# Altium PCB PCB2.PcbDoc
Units mm, origin at the board's own origin, x right, y up, seen from the top; angles counter-clockwise.
Board outline 100.24 x 100.25 mm, 2 copper layers (Top Layer, Bottom Layer); 22 components, 12 nets, 50 pads, 20 vias.
Unrouted connection lines stored in the file: 3.
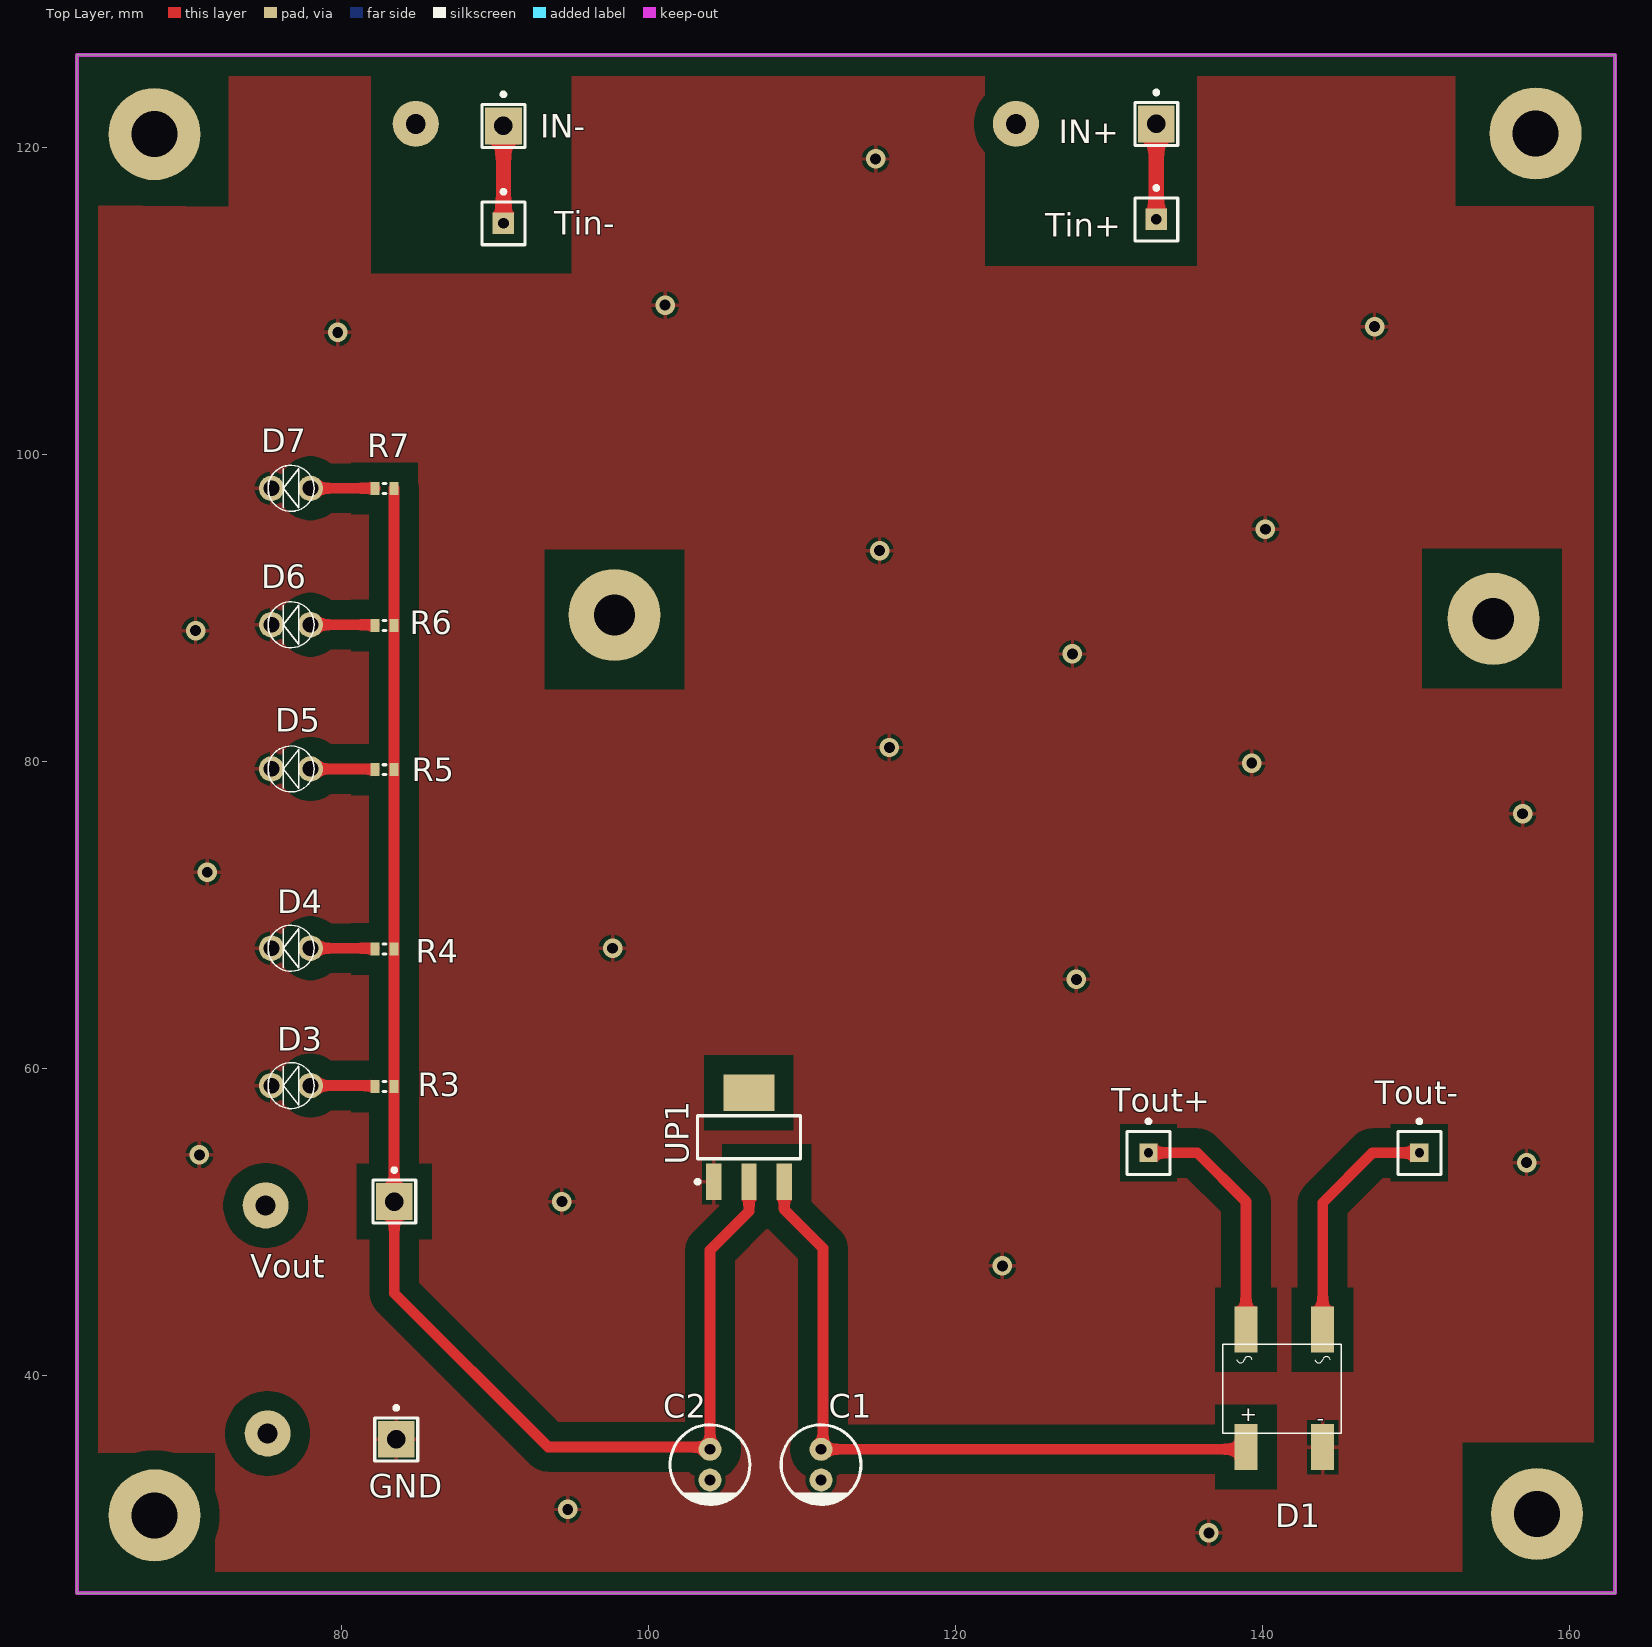
[diagram p0: Top Layer view]
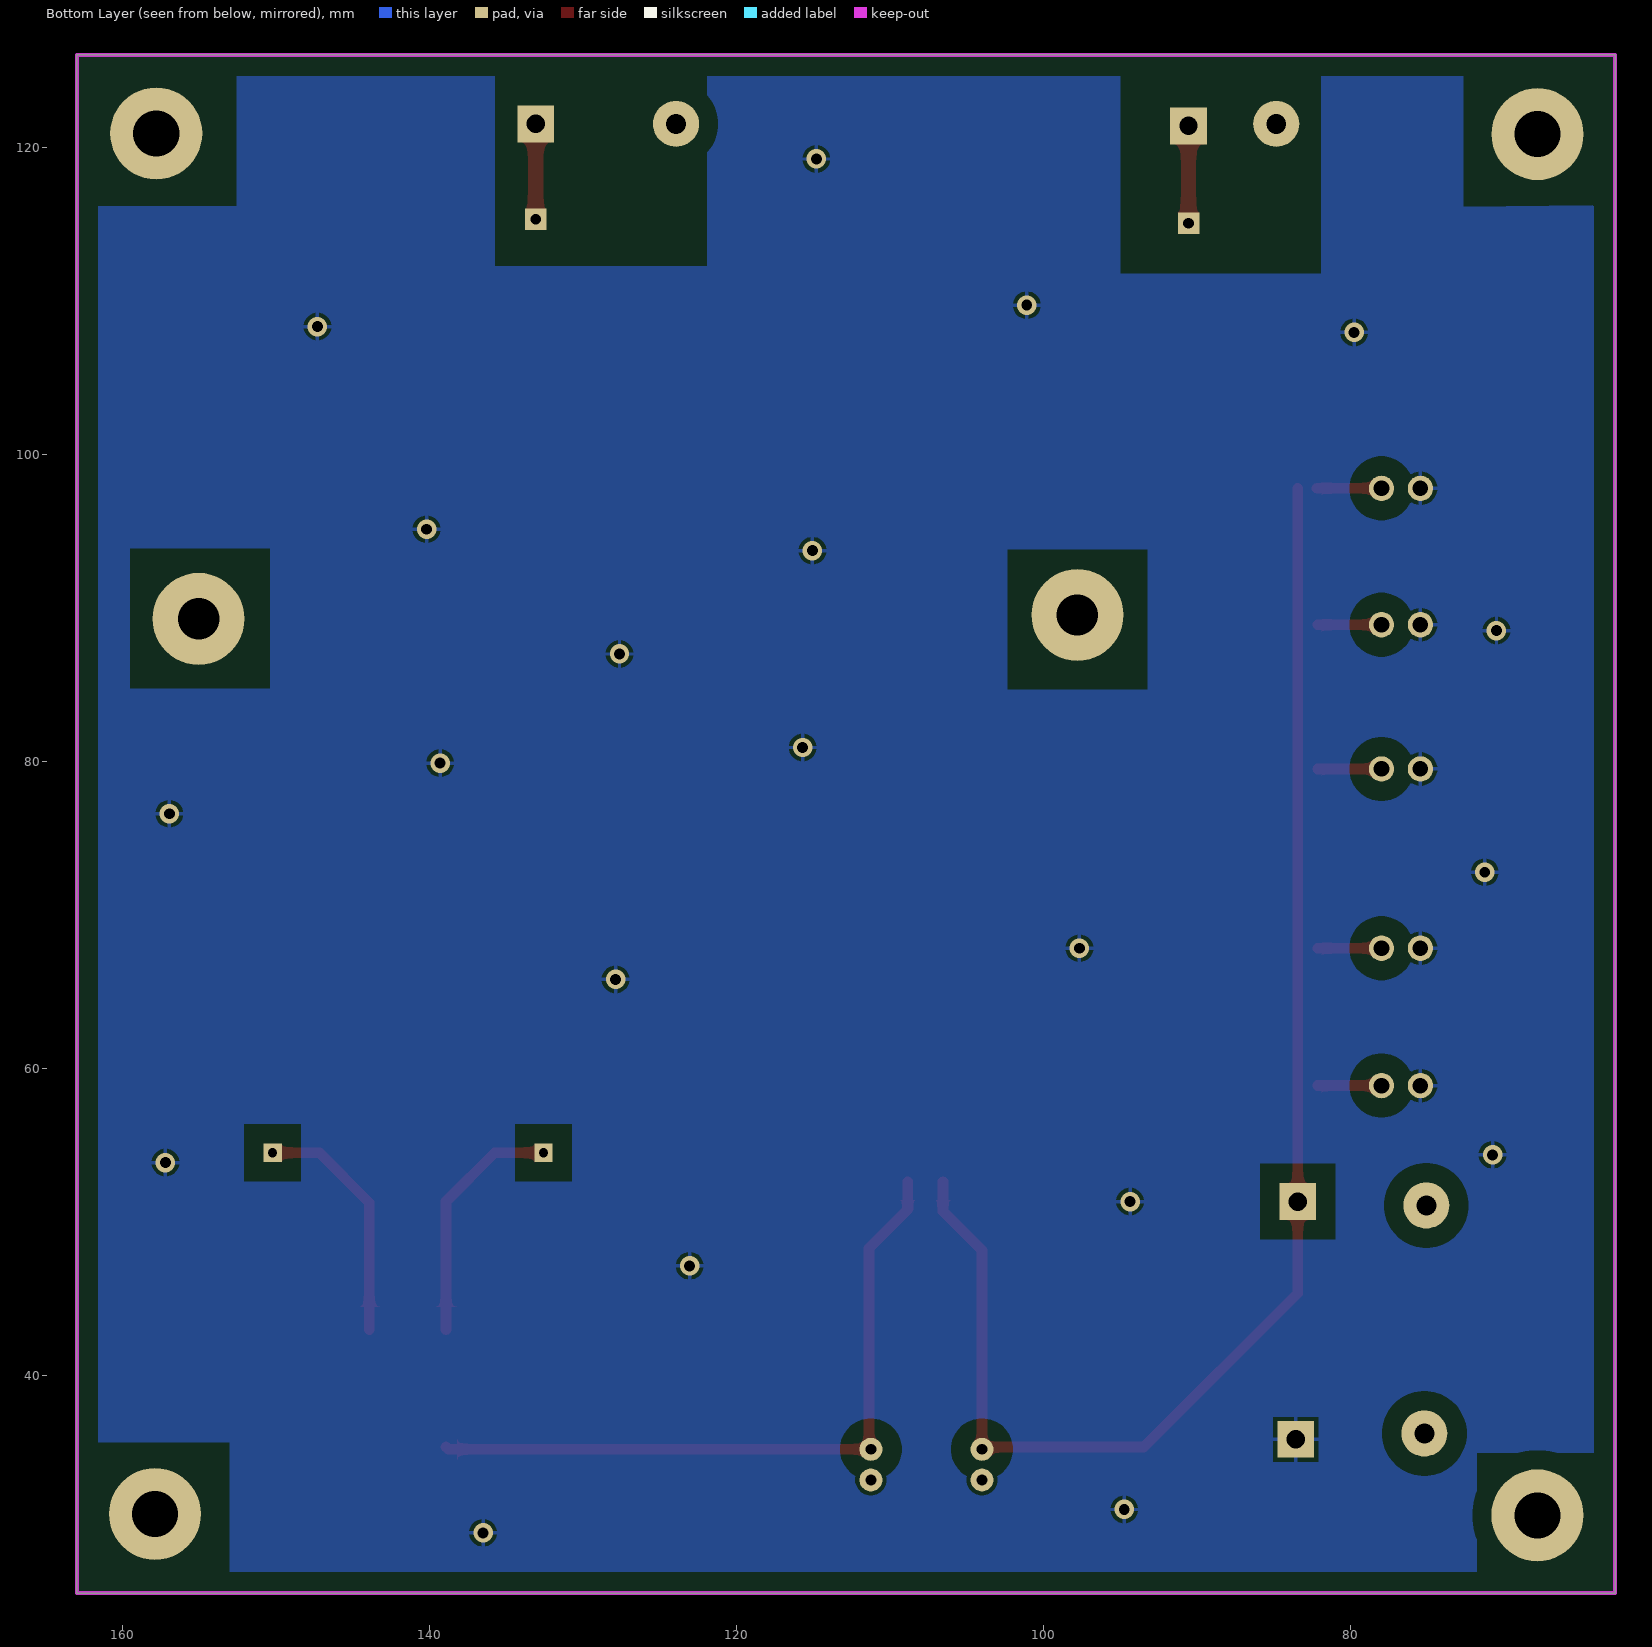
[diagram p1: Bottom Layer view, seen from below]
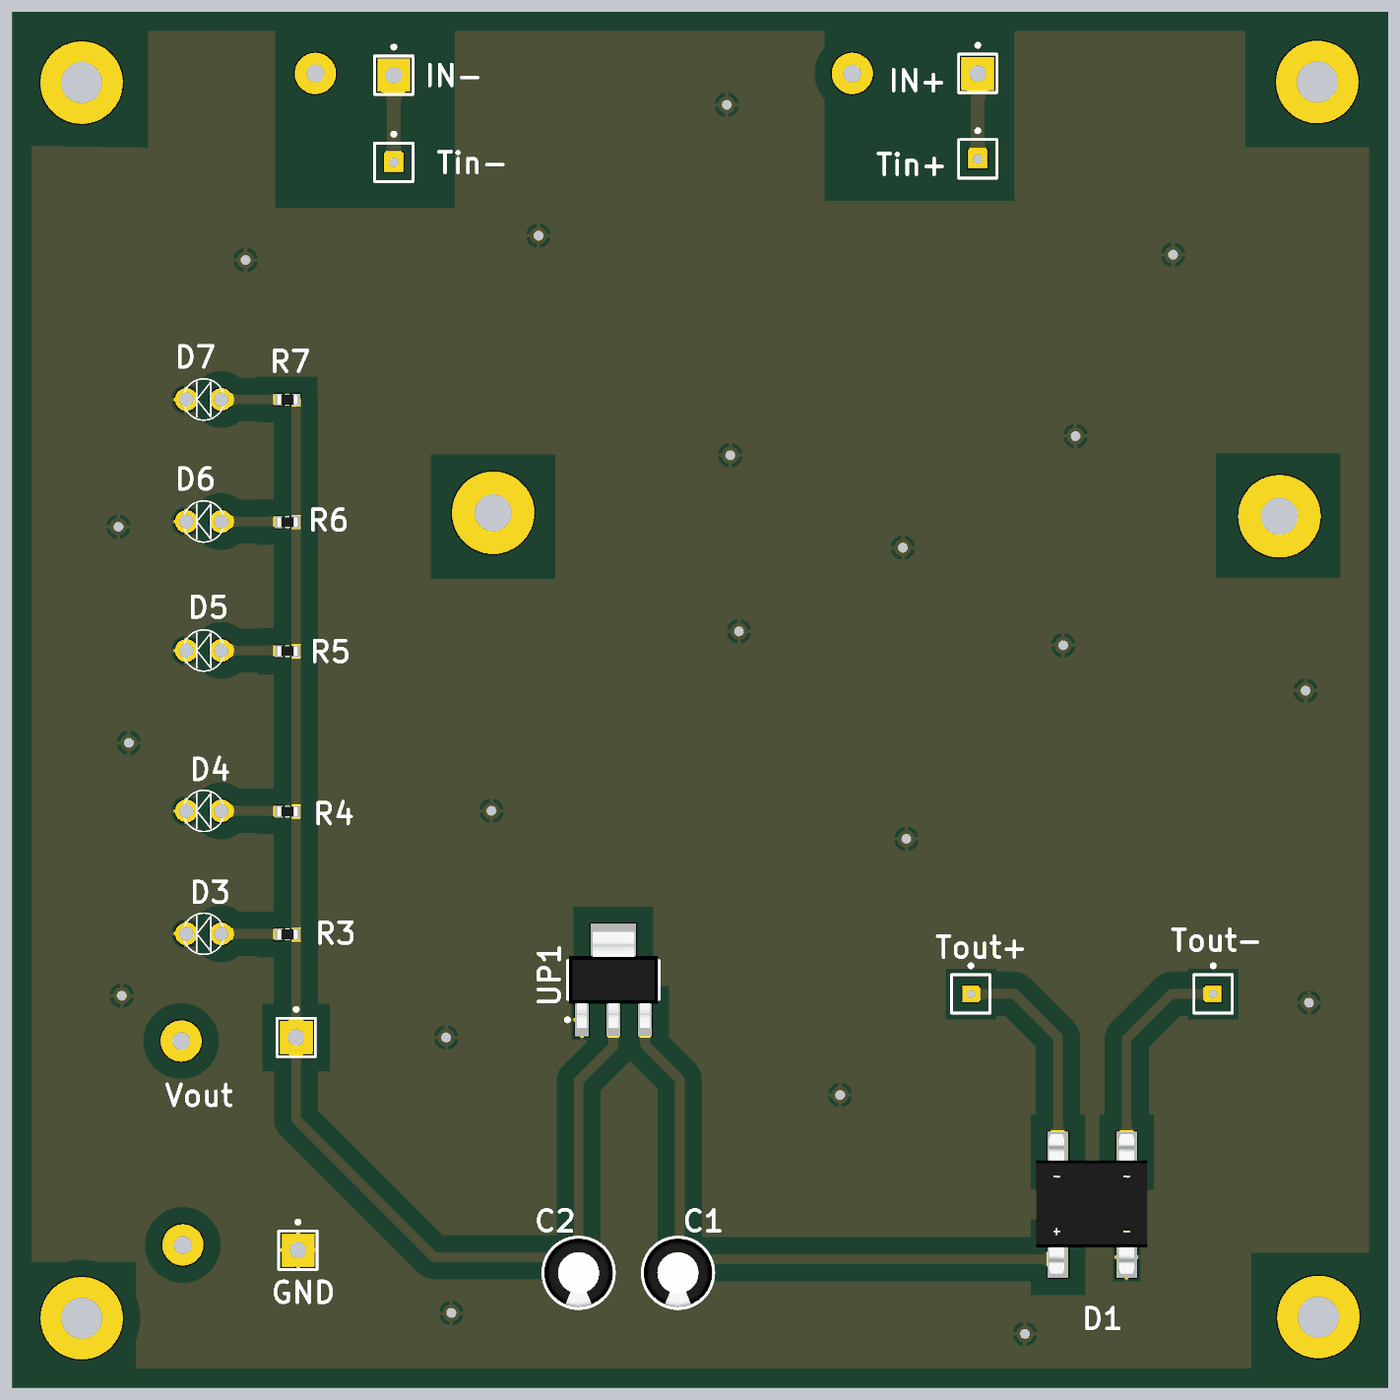
[diagram p2: 3D render of the assembled board from above, using the file's embedded part models]

## Layer stack, top to bottom
Top Solder: solder mask 0.0102, Solder Resist, Dk 3.5
Top Layer: signal copper 0.0356
Dielectric 1: dielectric 0.32, FR-4, Dk 4.8
Bottom Layer: signal copper 0.0356
Bottom Solder: solder mask 0.0102, Solder Resist, Dk 3.5

## Board outline
62.752,25.791 62.752,126.037 162.997,126.037 162.997,25.791

## Design rules (kind name [scope] priority, off if disabled: settings)
Clearance Clearance_3 [InNamedPolygon('GND_poly')] p1: gap=1.25 ignorepadtopadclearanceinfootprint=FALSE
Clearance Clearance_2 [InNamedPolygon('GND_poly')] p2: gap=1.25 ignorepadtopadclearanceinfootprint=FALSE
Clearance Clearance_1 [InNamedPolygon('GND_poly')] p3: gap=1.25 ignorepadtopadclearanceinfootprint=FALSE
Clearance [All] p4: gap=0.254 ignorepadtopadclearanceinfootprint=FALSE except(0: Arc-Hole Track-Hole SMDPad-Hole THPad-Hole Via-Hole Fill-Hole Poly-Hole Region-Hole Text-Hole)
PolygonConnect [All] p1: connectstyle=Relief reliefconductorwidth=0.254 reliefentries=4 polygonreliefangle="90 Angle" airgapwidth=0.254
RoutingVias [All] p1: holewidth=0.711 width=1.27 viastyle="Through Hole" minholewidth=0.711 minwidth=1.27 maxholewidth=0.711 maxwidth=1.27
SolderMaskExpansion [All] p1: expansion=0.102 istentingtop=FALSE
Width [All] p1 off: maxlimit=0.254 minlimit=0.254 preferedwidth=0.254
29 further rules are at their usual default settings.

## Components (designator, comment, footprint, x,y, rotation, side; value= is the part's Value field where it differs from the comment)
C1 "Capacitor_Ele" cap-ele-02. 111.252,34.163 r270 top value=1uF
C2 "Capacitor_Ele" cap-ele-02. 104.013,34.163 r270 top value=1uF
D1 "Bridge SMD Package" "Bridge SMD Package" 134.34,33.631 r0 top
D3 "LED-GREEN-3MM" LED-3MM-GREEN 77.978,58.866 r180 top
D4 "LED-GREEN-3MM" LED-3MM-GREEN 77.978,67.818 r180 top
D5 "LED-GREEN-3MM" LED-3MM-GREEN 77.978,79.502 r180 top
D6 "LED-GREEN-3MM" LED-3MM-GREEN 77.978,88.9 r180 top
D7 "LED-GREEN-3MM" LED-3MM-GREEN 77.978,97.79 r180 top
GND "Plug" PIN1#1 83.566,35.814 r0 top
IN+ "Plug" PIN1#1 133.096,121.539 r0 top
IN- "Plug" PIN1#1 90.551,121.412 r0 top
R3 "Resistor 0.25w" Resistor_SMD_0603 82.804,58.815 r0 top value=1K
R4 "Resistor 0.25w" Resistor_SMD_0603 82.804,67.767 r0 top value=1K
R5 "Resistor 0.25w" Resistor_SMD_0603 82.804,79.451 r0 top value=1K
R6 "Resistor 0.25w" Resistor_SMD_0603 82.804,88.849 r0 top value=1K
R7 "Resistor 0.25w" Resistor_SMD_0603 82.804,97.79 r0 top value=1K
Tin+ "Plug" PIN1#2 133.096,115.316 r0 top
Tin- "Plug" PIN1#2 90.551,115.062 r0 top
Tout+ "Plug" PIN1#3 132.588,54.483 r0 top
Tout- "Plug" PIN1#3 150.241,54.483 r0 top
UP1 "5V" SOT223_N 106.553,55.499 r90 top
Vout "Plug" PIN1#1 83.439,51.308 r0 top

## Footprints (in the part's own frame and the unit in brackets; to place one, negate y for a bottom-side part, rotate by r counter-clockwise, add the part's x,y. Pads: shape width x height; smd on the part's side, far side on the other; paste and mask are expansions set on the pad)
"Bridge SMD Package" [mm]
  rect 1.5x3 smd: 1(4.598,1.675) 2(4.598,9.325) 3(9.598,9.325) 4(9.598,1.675)
  silkscreen extent 3.1,2.58 10.8,8.37, body extent 3,0.48 11.1,10.62, height 2.7
cap-ele-02. [mm]
  round 1.5 hole 0.7: 1(-1,0) 2(1,0)
  silkscreen extent -2.6,-2.6 2.6,2.6, body extent -2.5,-2.5 2.49,2.5, height 7.26
LED-3MM-GREEN [mil]
  round 65 hole 40: A(0,0) K(100,0)
  silkscreen extent -9,-59 109,59, body extent -15,-63 114,67, height 250
PIN1#1 [mm] "Connector; Plug"
  rect 2.4x2.4 hole 1.2: 1(0,0)
  silkscreen extent -1.4,-1.4 1.4,2.17
PIN1#2 [mm] "Connector; Plug"
  rect 1.4x1.4 hole 0.7: 1(0,0)
  silkscreen extent -1.4,-1.4 1.4,2.17
PIN1#3 [mm] "Connector; Plug"
  rect 1.2x1.2 hole 0.6: 1(0,0)
  silkscreen extent -1.4,-1.4 1.4,2.17
Resistor_SMD_0603 [mm]
  rect 0.6x0.85 smd: 1(-0.622,0) 2(0.622,0)
  silkscreen extent -0.1,-0.32 0.1,0.33, body extent -0.76,-0.38 0.76,0.38, height 0.45
SOT223_N [mm] "SOT223, 4-Leads, Body 6.5x3.5mm, Pitch 2.3mm, Lead Span 7mm, IPC Medium Density"
  rect 2.4x1 smd: 1(-2.9,2.3) 2(-2.9,0) 3(-2.9,-2.3)
  rect 2.4x3.3 smd: 4(2.9,0)
  silkscreen extent -3.02,-3.35 1.4,3.47, body extent -3.49,-3.24 3.49,3.24, height 1.64

## Part data
C1 C2: library part Capacitor_Ele., Voltage=16v, LatestRevisionDate=17-Jul-2002, LatestRevisionNote="Re-released for DXP Platform.", Publisher="Altium Limited"
R3 R4 R5 R6 R7: library part Resistor, LatestRevisionDate=17-Jul-2002, LatestRevisionNote="Re-released for DXP Platform.", Publisher="Altium Limited"
UP1: library part AMS1117-x.x, "x.x Volt, 800mA Low-Dropout Linear Regulator, 4-pin SOT-223", Data=16-12-2016, Designer="Ali Hafizi"
GND Tout+ Tout- Vout: LatestRevisionDate=17-Jul-2002, LatestRevisionNote="Re-released for DXP Platform.", Publisher="Altium Limited"
IN+ IN- Tin+ Tin-: Publisher="Altium Limited", Revision="17-Jul-2002: Re-released for DXP Platform."

## Free pads (board coordinates)
  round 3 hole 1.3: 1.3(84.836,121.539) 12(123.952,121.539) 14(75.057,51.054) 15(75.184,36.195)
  round 6 hole 3: 3(67.818,30.861) 4(67.808,120.87) 5(157.823,120.915) 6(157.906,30.948)
  round 6 hole 2.7: 18(155.067,89.281) 19(97.79,89.535)

## Via types
v1: diameter 1.27, hole 0.711, Top Layer to Bottom Layer, tented both sides, 20 vias

## Nets (pads, with @x,y where several pads share a name; then routed paths per layer and width w, separated by ;. In a path a pad name is that pad's centre, name@x,y a point inside that pad or via, vN(x,y) a via of type N, cw(c..) or ccw(c..) an arc to the next point about the centre after c; other vN are vias at no path point)
GND: C1.2 C2.2 D1.4 D3.K D4.K D5.K D6.K D7.K GND.1 UP1.1
  other v1: 136.525,29.718 94.742,31.242 123.063,47.117 94.361,51.308 157.226,53.848 70.739,54.356 127.889,65.786 97.663,67.818 71.247,72.771 156.972,76.581 139.319,79.883 115.697,80.899 127.635,86.995 70.485,88.519 115.062,93.726 140.208,95.123 79.756,107.95 147.32,108.331 101.092,109.728 114.808,119.253
NetC1_1: C1.1 D1.1 UP1.3 | length 46.3
  Top Layer w0.7: UP1.3 108.853,50.786 111.379,48.26 111.379,35.29 C1.1 138.795,35.163 D1.1
NetD1_2: D1.2 Tout+.1 | length 16
  Top Layer w0.7: Tout+.1 135.763,54.483 138.938,51.308 D1.2
NetD1_3: D1.3 Tout-.1 | length 15.9
  Top Layer w0.7: D1.3 143.938,51.228 147.193,54.483 Tout-.1
NetD3_A: D3.A R3.1 | length 4.2
  Top Layer w0.254: R3.1@82.131,58.866 R3.1
  Top Layer w0.7: D3.A R3.1@82.131,58.866
NetD4_A: D4.A R4.1 | length 4.2
  Top Layer w0.254: R4.1@82.131,67.818 R4.1
  Top Layer w0.7: D4.A R4.1@82.131,67.818
NetD5_A: D5.A R5.1 | length 4.2
  Top Layer w0.254: R5.1@82.131,79.502 R5.1
  Top Layer w0.7: D5.A R5.1@82.131,79.502
NetD6_A: D6.A R6.1 | length 4.2
  Top Layer w0.254: R6.1@82.131,88.9 R6.1
  Top Layer w0.7: D6.A R6.1@82.131,88.9
NetD7_A: D7.A R7.1 | length 4.2
  Top Layer w0.7: D7.A R7.1
NetIN+_1: IN+.1 Tin+.1 | length 6.2
  Top Layer w1: Tin+.1 IN+.1
NetIN-_1: IN-.1 Tin-.1 | length 6.3
  Top Layer w1: Tin-.1 IN-.1
Vout: C2.1 R3.2 R4.2 R5.2 R6.2 R7.2 UP1.2 Vout.1 | length 95.7
  Top Layer w0.254: Vout.1@83.426,51.308 Vout.1
  Top Layer w0.7: Vout.1@83.426,51.308 R3.2 R4.2 R5.2 R6.2 R7.2 ; Vout.1 83.439,45.339 93.472,35.306 103.87,35.306 C2.1 104.013,48.133 106.553,50.673 UP1.2
pads on no net: UP1.4

## Polygon pours and split planes (outlines as drawn)
GND on Bottom Layer "GND_Poly" (solid, remove dead copper, pour order 1): 167.132,130.429 59.69,130.429 57.912,128.651 57.912,20.701 166.878,20.701 167.132,20.955
GND on Top Layer "GND_Poly" (solid, remove dead copper, pour order 0): 59.817,129.921 60.071,129.667 164.592,129.667 164.592,25.019 162.306,22.733 162.179,22.86 60.198,22.86

## Keep-outs
Keep-Out Layer:
  the board outline again, w0.254

## Other copper
Multi-Layer:
  pour cut-out: 94.996,128.27 94.996,111.76 81.915,111.76 81.915,128.27
  pour cut-out: 135.763,129.032 135.763,112.268 121.92,112.268 121.92,129.032
  pour cut-out: 163.322,126.413 163.322,116.157 152.59,116.157 152.59,126.413
  pour cut-out: 163.322,35.632 163.322,25.527 153.022,25.527 153.022,35.632
  pour cut-out: 71.755,34.925 71.755,25.335 62.295,25.335 62.295,34.925
  pour cut-out: 72.644,126.691 72.644,116.144 62.23,116.277 62.23,126.691
  pour cut-out: 159.512,93.853 159.512,84.772 150.431,84.772 150.431,93.853
  pour cut-out: 102.33,93.789 102.33,84.709 93.25,84.709 93.25,93.789

## Silkscreen, mask and mechanical layers (free items; w line width, h text height)
Mechanical 1:
  circle w0.013: c157.871,30.914 r1.5
  circle w0.013: c67.871,120.914 r1.5
  circle w0.013: c67.871,30.914 r1.5
  circle w0.013: c157.871,120.914 r1.5
  lines w0.013: 62.871,25.914 62.871,125.914 162.871,125.914 162.871,25.914 62.871,25.914

## Text inside footprints (layer, text, board x,y; h text height)
D1: Top Overlay "+" at 138.538,37.006 h1; Top Overlay "-" at 143.538,36.706 h1